# Altium PCB FPGA_Frontpanel_2_V2.PcbDoc
Units mm, origin at the board's own origin, x right, y up, seen from the top; angles counter-clockwise.
Board outline 175 x 40 mm, 2 copper layers (Top Layer, Bottom Layer), stack 1.66 mm thick; 30 components, 16 nets, 109 pads, 14 vias.
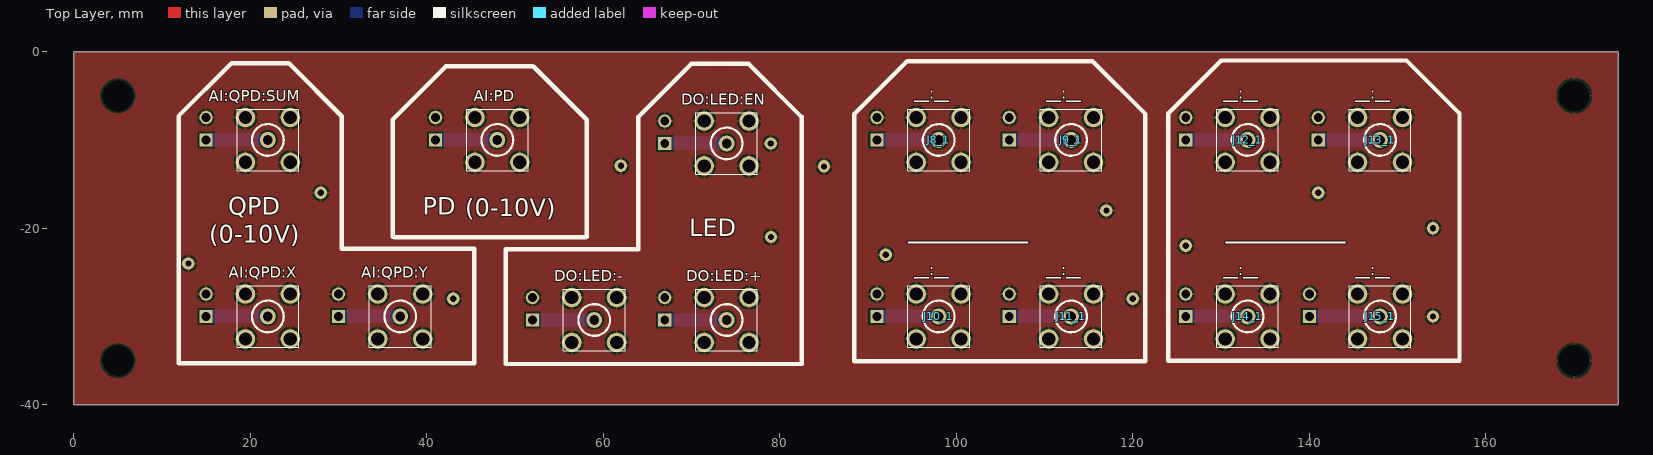
[diagram p0: Top Layer view]
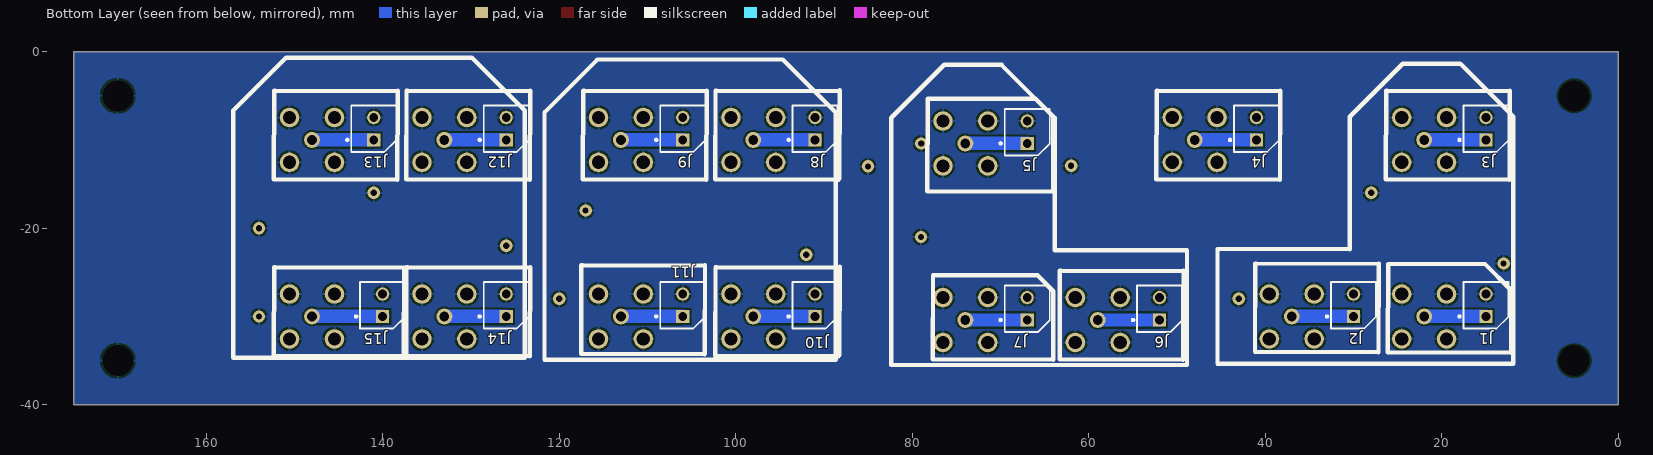
[diagram p1: Bottom Layer view, seen from below]
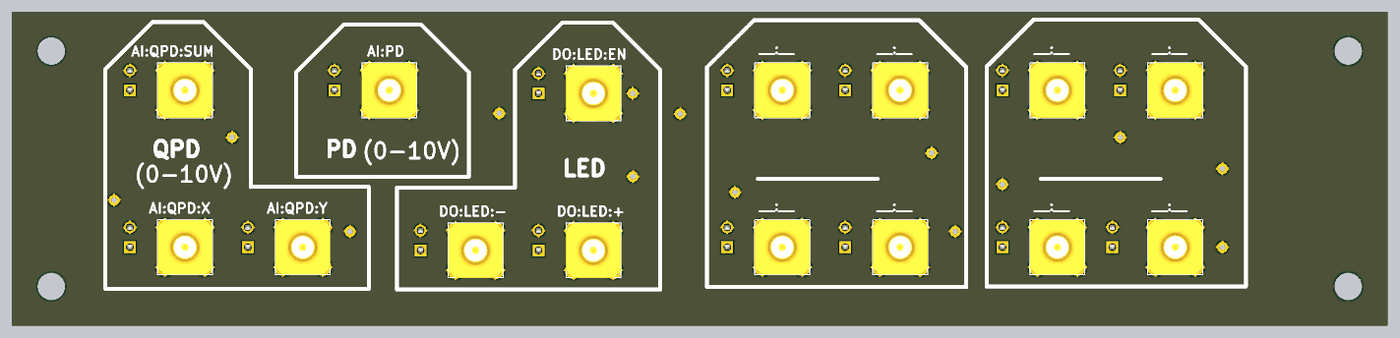
[diagram p2: 3D render of the assembled board from above, using the file's embedded part models]
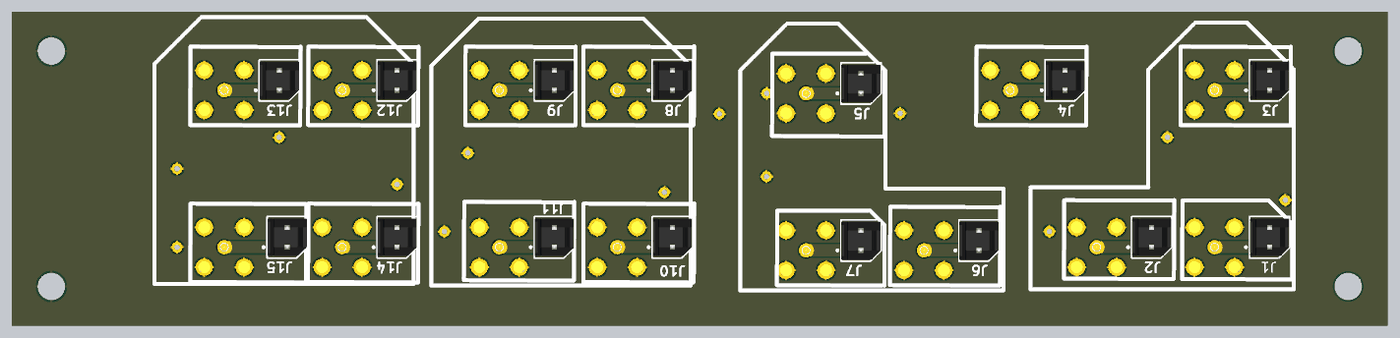
[diagram p3: 3D render of the assembled board from below, using the file's embedded part models]

## Layer stack, top to bottom
Top Solder: solder mask 0.0102, Solder Resist, Dk 3.5
Top Layer: signal copper 0.055
Dielectric1: dielectric 1.55, FR-4, Dk 4.8
Bottom Layer: signal copper 0.055
Bottom Solder: solder mask 0.0102, Solder Resist, Dk 3.5

## Board outline
0,-40 175,-40 175,0 0,0

## Design rules (kind name [scope] priority, off if disabled: settings)
Clearance clearance_polygons [InNamedPolygon('top_gnd_power')or InNamedPolygon('bottom_gnd_power') vs InNamedPolygon('top_gnd_uc')or InNamedPolygon('bottom_gnd_uc')] p1: gap=1.5 ignorepadtopadclearanceinfootprint=FALSE except(0: Arc-Hole Track-Hole SMDPad-Hole THPad-Hole Via-Hole Fill-Hole Poly-Hole Region-Hole Text-Hole)
Clearance ClearanceRoom [WithinRoom('less')  or WithinRoom('less1') or WithinRoom('less2') or WithinRoom('less3') or WithinRoom('less4')] p2: gap=0.15 ignorepadtopadclearanceinfootprint=FALSE
Clearance clearance_HP_class [InNetClass('high_power_net')] p3: gap=0.381 ignorepadtopadclearanceinfootprint=FALSE except(0: Arc-Hole Track-Hole SMDPad-Hole THPad-Hole Via-Hole Fill-Hole Poly-Hole Region-Hole Text-Hole)
Clearance "clearance_24V class" [InNetClass('24V_net')] p4: gap=0.254 ignorepadtopadclearanceinfootprint=FALSE except(0: Arc-Hole Track-Hole SMDPad-Hole THPad-Hole Via-Hole Fill-Hole Poly-Hole Region-Hole Text-Hole)
Clearance Clearance_1 [All] p5: gap=0.203 ignorepadtopadclearanceinfootprint=FALSE
FabricationTestPointUsage TestPointUsage [All] p1: valid=0 allowmultiple=FALSE
FabricationTestpoint Testpoint [All] p1: side=3 testpointundercomponent=TRUE minsize=1.016 maxsize=2.54 preferedsize=1.524 minholesize=0 maxholesize=1.016 preferedholesize=0.813 testpointgrid=0.025 allowsidetop=TRUE allowsidebottom=TRUE usegrid=TRUE gridtolerance=0
HoleSize [All] p1: absolutevalues=TRUE maxlimit=6 minlimit=0.025 maxpercent=80.000 minpercent=20.000
PolygonConnect PolygonConnect_Power [(InNet('+5V') OR InNet('-24VBUS'))] p1: connectstyle=Relief reliefconductorwidth=2.54 reliefentries=4 polygonreliefangle="90 Angle" airgapwidth=0.254
PolygonConnect [All] p2: connectstyle=Relief reliefconductorwidth=0.254 reliefentries=4 polygonreliefangle="90 Angle" airgapwidth=0.254
RoutingVias ViasRoom [WithinRoom('less')  or WithinRoom('less1') or WithinRoom('less2') or WithinRoom('less3') or WithinRoom('less4')] p1: holewidth=0.3 width=0.45 viastyle="Through Hole" minholewidth=0.3 minwidth=0.45 maxholewidth=0.3 maxwidth=0.45
RoutingVias [All] p2: holewidth=0.5 width=0.7 viastyle="Through Hole" minholewidth=0.3 minwidth=0.5 maxholewidth=0.711 maxwidth=1.27
SilkToSolderMaskClearance SilkscreenOverComponentPads [IsPad] p1: minsilkscreentomaskgap=0.254 clearancetoexposedcopper=TRUE
SolderMaskExpansion [All] p1: expansion=0.102 istentingtop=FALSE
Width WidthRoom [WithinRoom('less')  or WithinRoom('less1') or WithinRoom('less2') or WithinRoom('less3') or WithinRoom('less4')] p1: maxlimit=0.3 minlimit=0.3 preferedwidth=0.3
Width Width_HC_class [InNetClass('High_Current_net')] p2: maxlimit=15.24 minlimit=1.524 preferedwidth=1.524
Width Width_HP_class [InNetClass('High_Power_net')] p3: maxlimit=1.016 minlimit=1.016 preferedwidth=1.016
Width "Width_24V class" [InNetClass('24V_net')] p4: maxlimit=0.762 minlimit=0.762 preferedwidth=0.762
Width Width_1 [All] p5: maxlimit=1.524 minlimit=1.524 preferedwidth=1.524
26 further rules are at their usual default settings.

## Components (designator, comment, footprint, x,y, rotation, side; value= is the part's Value field where it differs from the comment)
AI:PD "J01160A0211" J01160A0211 48,-10 r0 top
AI:QPD:SUM "J01160A0211" J01160A0211 22,-10 r0 top
AI:QPD:X "J01160A0211" J01160A0211 22,-30 r0 top
AI:QPD:Y "J01160A0211" J01160A0211 37,-30 r0 top
DO:LED:+ "J01160A0211" J01160A0211 73.975,-30.4 r90 top
DO:LED:- "J01160A0211" J01160A0211 58.975,-30.4 r90 top
DO:LED:EN "J01160A0211" J01160A0211 73.975,-10.4 r90 top
J1 "66100211622" 66100211622 15,-30 r270 bottom
J2 "66100211622" 66100211622 30,-30 r270 bottom
J3 "66100211622" 66100211622 15,-10 r270 bottom
J4 "66100211622" 66100211622 41,-10 r270 bottom
J5 "66100211622" 66100211622 66.975,-10.4 r270 bottom
J6 "66100211622" 66100211622 51.975,-30.4 r270 bottom
J7 "66100211622" 66100211622 66.975,-30.4 r270 bottom
J8 "66100211622" 66100211622 91,-10 r270 bottom
J8_1 "__:__" J01160A0211 98,-10 r90 top
J9 "66100211622" 66100211622 106,-10 r270 bottom
J9_1 "__:__" J01160A0211 113,-10 r90 top
J10 "66100211622" 66100211622 91,-30 r270 bottom
J10_1 "__:__" J01160A0211 98,-30 r90 top
J11 "66100211622" 66100211622 106,-30 r270 bottom
J11_1 "__:__" J01160A0211 113,-30 r90 top
J12 "66100211622" 66100211622 126,-10 r270 bottom
J12_1 "__:__" J01160A0211 133,-10 r90 top
J13 "66100211622" 66100211622 141,-10 r270 bottom
J13_1 "__:__" J01160A0211 148,-10 r90 top
J14 "66100211622" 66100211622 126,-30 r270 bottom
J14_1 "__:__" J01160A0211 133,-30 r90 top
J15 "66100211622" 66100211622 140,-30 r270 bottom
J15_1 "__:__" J01160A0211 148,-30 r90 top

## Footprints (in the part's own frame and the unit in brackets; to place one, negate y for a bottom-side part, rotate by r counter-clockwise, add the part's x,y. Pads: shape width x height; smd on the part's side, far side on the other; paste and mask are expansions set on the pad)
66100211622 [mm] "2 Pins, stehend 2.54mm Intercom Stiftleiste WR-WTB"
  rect 1.5x1.5 hole 1: 1(0,0)
  round 1.5 hole 1: 2(-2.54,0)
  silkscreen extent -3.91,-3.13 1.37,2.55, body extent -3.66,-2.5 1.12,2.5, height 11.33
J01160A0211 [mm] "Platinenstecker  gerade, 50 Ohm, SMB"
  round 1.8 hole 1.1: 1(0,0)
  round 2.2 hole 1.5: 2(-2.54,-2.54) 2(-2.54,2.54) 2(2.54,-2.54) 2(2.54,2.54)
  silkscreen extent -3.49,-3.49 3.49,3.49, body extent -3.5,-3.5 3.5,3.5, height 7.61

## Part data
AI:PD AI:QPD:SUM AI:QPD:X AI:QPD:Y DO:LED:+ DO:LED:- DO:LED:EN J8_1 J9_1 J10_1 J11_1 J12_1 J13_1 J14_1 J15_1: library part CMP-00545-1, "RF SMB Connector, Male, Board Mount, Solder Terminal, Receptacle", Operating Frequency-Max=4kHz, Body/Shell Style=RECEPTACLE, Characteristic Impedance=50R, Connector Type=SMB, Contact Finish - Mating="COPPER NICKEL GOLD", Contact Finish - Termination=GOLD, Contact Gender=Male, Coupling Type=Snap, DIN Conformance=No, Filter Feature=No, IEC Conformance=Yes, Insulation Material=POLYTETRAFLUORO, JESD-609 Code=e4, MIL Conformance=No, Mount=Board, Mounting Style=STRAIGHT, Option="General Purpose", Panel Mount=No, REACH SVHC=Yes, RoHS Compliant=No, Termination=Solder, VSWR=1.35
J1 J2 J3 J4 J5 J6 J7 J8 J9 J10 J11 J12 J13 J14 J15: library part CMP-001-0161-A.3, "WR-WTB 2.54 mm Male Vertical Shrouded Header 2 Pins", Manufacturer="Wurth Electronics", Supplier Part Number=732-14102-ND, PartNumber=66100211622, Supplier=Digi-Key

## Free pads (board coordinates)
  round 3.302 hole 3.505 unplated: 0(5,-35) 0(5,-5) 0(170,-35) 0(170,-5)

## Via types
v1: diameter 1.4, hole 0.711, Top Layer to Bottom Layer, 14 vias

## Nets (pads, with @x,y where several pads share a name; then routed paths per layer and width w, separated by ;. In a path a pad name is that pad's centre, name@x,y a point inside that pad or via, vN(x,y) a via of type N, cw(c..) or ccw(c..) an arc to the next point about the centre after c; other vN are vias at no path point)
GND: AI:PD.2 AI:QPD:SUM.2 AI:QPD:X.2 AI:QPD:Y.2 DO:LED:+.2 DO:LED:-.2 DO:LED:EN.2 J1.2 J2.2 J3.2 J4.2 J5.2 J6.2 J7.2 J8.2 J8_1.2 J9.2 J9_1.2 J10.2 J10_1.2 J11.2 J11_1.2 J12.2 J12_1.2 J13.2 J13_1.2 J14.2 J14_1.2 J15.2 J15_1.2 pad.0@170,-5 pad.0@170,-35
  other v1: 154,-30 43,-28 120,-28 13,-24 92,-23 126,-22 79,-21 154,-20 117,-18 28,-16 141,-16 85,-13 62,-12.94 78.975,-10.4
NetAI:PD_1: AI:PD.1 J4.1 | length 7
  Bottom Layer w1.524: J4.1 AI:PD.1
NetAI:QPD:SUM_1: AI:QPD:SUM.1 J3.1 | length 7
  Bottom Layer w1.524: J3.1 AI:QPD:SUM.1
NetAI:QPD:X_1: AI:QPD:X.1 J1.1 | length 7
  Bottom Layer w1.524: J1.1 AI:QPD:X.1
NetAI:QPD:Y_1: AI:QPD:Y.1 J2.1 | length 7
  Bottom Layer w1.524: J2.1 AI:QPD:Y.1
NetDO:LED:+_1: DO:LED:+.1 J7.1 | length 7
  Bottom Layer w1.524: J7.1 DO:LED:+.1
NetDO:LED:-_1: DO:LED:-.1 J6.1 | length 7
  Bottom Layer w1.524: J6.1 DO:LED:-.1
NetDO:LED:EN_1: DO:LED:EN.1 J5.1 | length 7
  Bottom Layer w1.524: J5.1 DO:LED:EN.1
NetJ8_1: J8.1 J8_1.1 | length 7
  Bottom Layer w1.524: J8.1 J8_1.1
NetJ9_1: J9.1 J9_1.1 | length 7
  Bottom Layer w1.524: J9.1 J9_1.1
NetJ10_1: J10.1 J10_1.1 | length 7
  Bottom Layer w1.524: J10.1 J10_1.1
NetJ11_1: J11.1 J11_1.1 | length 7
  Bottom Layer w1.524: J11.1 J11_1.1
NetJ12_1: J12.1 J12_1.1 | length 7
  Bottom Layer w1.524: J12.1 J12_1.1
NetJ13_1: J13.1 J13_1.1 | length 7
  Bottom Layer w1.524: J13.1 J13_1.1
NetJ14_1: J14.1 J14_1.1 | length 7
  Bottom Layer w1.524: J14.1 J14_1.1
NetJ15_1: J15.1 J15_1.1 | length 8
  Bottom Layer w1.524: J15.1 J15_1.1

## Polygon pours and split planes (outlines as drawn)
GND on Top Layer "top gnd" (solid, remove dead copper, pour order 0): 0,-40 175,-40 175,0 0,0
GND on Bottom Layer "bot gnd" (solid, remove dead copper, pour order 1): 0,-40 175,-40 175,0 0,0

## Silkscreen, mask and mechanical layers (free items; w line width, h text height)
Top Overlay:
  lines w0.5: 24.386,-1.309 30.386,-7.309 ; 24.386,-1.299 17.89,-1.299 11.89,-7.299 11.89,-35.299 45.386,-35.299 45.386,-22.309 30.386,-22.309 ; 30.392,-22.321 30.392,-7.309 ; 36.129,-21 36.129,-7.701 42.178,-1.652 52,-1.652 ; 36.32,-21.047 58,-21.047 ; 52.129,-1.701 58.129,-7.701 58.129,-21 ; 63.968,-22.412 63.968,-7.4 ; 63.975,-22.4 48.975,-22.4 48.975,-35.391 82.471,-35.391 82.471,-7.391 76.471,-1.391 69.975,-1.391 ; 63.975,-7.4 69.975,-1.4 ; 88.42,-35.074 121.42,-35.074 121.42,-7.074 115.42,-1.074 94.42,-1.074 88.42,-7.074 88.42,-35.074 ; 124,-35 124,-7 130,-1 151,-1 157,-7 157,-35 124,-35
  text "QPD" at 17.54,-18.46 h2
  text "PD" at 39.54,-18.46 h2
  text "(0-10V)" at 44.34,-18.66 h2
  text "LED" at 69.759,-20.9 h2
  text "__________" at 94.54,-21.127 h2
  text "__________" at 130.54,-21.127 h2
  text "(0-10V)" at 15.34,-21.66 h2
Bottom Overlay:
  lines w0.5: 12.129,-34.048 12.129,-27.031 15.103,-24.057 25.96,-24.057 ; 12.146,-34.108 26.129,-34.048 26.086,-24.057 ; 12.289,-4.441 12.331,-14.432 ; 12.34,-4.501 26.163,-4.442 ; 12.348,-14.492 26.331,-14.432 26.289,-4.441 ; 24.417,-1.362 30.417,-7.362 ; 24.417,-1.353 17.921,-1.353 11.921,-7.353 11.921,-35.353 45.417,-35.353 45.417,-22.362 30.417,-22.362 ; 27.126,-23.999 27.169,-33.991 ; 27.177,-24.059 41,-24 ; 27.186,-34.05 41.169,-33.991 41.126,-23.999 ; 30.423,-22.374 30.423,-7.362 ; 38.289,-4.441 38.331,-14.432 ; 38.34,-4.501 52.163,-4.442 ; 38.348,-14.492 52.331,-14.432 52.289,-4.441 ; 49.264,-24.841 49.306,-34.832 ; 49.315,-24.9 63.138,-24.841 ; 49.323,-34.892 63.306,-34.832 63.264,-24.841 ; 63.864,-22.52 63.864,-7.507 ; 63.87,-22.507 48.87,-22.507 48.87,-35.498 82.366,-35.498 82.366,-7.498 76.366,-1.498 69.87,-1.498 ; 63.87,-7.507 69.87,-1.507 ; 88.212,-24.39 88.255,-34.382 ; 88.212,-4.39 88.255,-14.382 ; 88.34,-24.501 102.163,-24.442 ; 88.34,-4.501 102.163,-4.442 ; 88.348,-34.492 102.331,-34.432 102.289,-24.441 ; 88.348,-14.492 102.331,-14.432 102.289,-4.441 ; 103.289,-4.441 103.331,-14.432 ; 103.34,-4.501 117.163,-4.442 ; 103.348,-14.492 117.331,-14.432 117.289,-4.441 ; 103.471,-24.214 103.514,-34.205 ; 103.522,-24.273 117.345,-24.214 ; 103.531,-34.264 117.514,-34.205 117.471,-24.214 ; 123.289,-24.441 123.331,-34.432 ; 123.289,-4.441 123.331,-14.432 ; 123.34,-24.501 137.163,-24.442 ; 123.34,-4.501 137.163,-4.442 ; 123.348,-34.492 137.331,-34.432 137.289,-24.441 ; 123.348,-14.492 137.331,-14.432 137.289,-4.441 ; 138.289,-4.441 138.331,-14.432 ; 138.34,-4.501 152.163,-4.442 ; 138.348,-14.492 152.331,-14.432 152.289,-4.441 ; 152.163,-24.442 137.548,-24.504 137.591,-34.495 152.331,-34.432 152.289,-24.441 ; 64.011,-34.894 64.011,-27.14 65.806,-25.346 77.645,-25.346 77.685,-34.835 64.011,-34.894 ; 64.016,-15.893 64.016,-7.359 66.027,-5.347 78.262,-5.347 78.306,-15.832 64.016,-15.893 ; 88.659,-34.884 121.659,-34.884 121.659,-6.884 115.659,-0.884 94.659,-0.884 88.659,-6.884 88.659,-34.884 ; 123.909,-34.667 123.909,-6.667 129.909,-0.667 150.909,-0.667 156.909,-6.667 156.909,-34.667 123.909,-34.667
M1_BoardOutline:
  the board outline again, w0.5
M12_titleBlock:
  lines w0.127: -10.932,-224.52 -10.932,-31.48 ; -10.932,-176.26 -5.852,-176.26 ; -10.932,-128 -5.852,-128 ; -10.932,-79.74 -5.852,-79.74 ; -10.924,-177.352 -10.924,15.688 ; -10.924,-129.092 -5.844,-129.092 ; -10.924,-80.832 -5.844,-80.832 ; -10.924,-32.572 -5.844,-32.572 ; -5.852,-219.44 -5.852,-36.56 ; -5.844,-172.272 -5.844,10.608 ; 125.998,-188.973 162.574,-188.973 ; 126.006,-141.805 162.582,-141.805 ; 126.228,-188.96 126.228,-219.44 161.788,-219.44 ; 126.236,-141.792 126.236,-172.272 161.796,-172.272 ; 135.118,-224.52 135.118,-219.44 ; 135.126,-177.352 135.126,-172.272 ; 162.525,-211.82 276.088,-211.82 ; 162.525,-204.2 276.088,-204.2 ; 162.525,-196.58 199.888,-196.58 ; 162.533,-164.652 276.096,-164.652 ; 162.533,-157.032 276.096,-157.032 ; 162.533,-149.412 199.896,-149.412 ; 199.888,-219.44 199.888,-204.2 199.888,-188.96 ; 199.896,-172.272 199.896,-157.032 199.896,-141.792 ; 208.143,-224.52 208.143,-219.44 ; 208.151,-177.352 208.151,-172.272 ; 208.151,10.608 208.151,15.688 ; 253.228,-219.44 253.228,-204.2 ; 253.236,-172.272 253.236,-157.032 ; 276.088,-176.26 281.168,-176.26 ; 276.088,-128 281.168,-128 ; 276.088,-79.74 281.168,-79.74 ; 276.088,-36.56 276.088,-219.44 ; 276.096,-129.092 281.176,-129.092 ; 276.096,-80.832 281.176,-80.832 ; 276.096,-32.572 281.176,-32.572 ; 276.096,10.608 276.096,-172.272 ; 281.168,-224.52 281.168,-31.48 ; 281.176,-177.352 281.176,15.688 ; 199.888,-188.96 162.525,-188.96 162.525,-219.44 276.088,-219.44 ; 199.888,-188.96 276.088,-188.96 276.088,-219.44 ; 199.896,-141.792 276.096,-141.792 276.096,-172.272 ; 199.896,-141.792 162.533,-141.792 162.533,-172.272 276.096,-172.272
  lines w0.254: 228.882,-188.338 228.882,-38.478 ; 228.882,-98.116 274.602,-98.116 274.602,-95.576 274.602,-76.578 ; 228.882,-76.578 274.602,-76.578 ; 228.882,-71.498 274.602,-71.498 274.602,-76.578 ; 228.89,-141.17 228.89,8.69 ; 228.89,-50.948 274.61,-50.948 274.61,-48.408 274.61,-29.41 ; 228.89,-29.41 274.61,-29.41 ; 228.89,-24.33 274.61,-24.33 274.61,-29.41
  text "1" at 25.322,12.259 h1.24
  text "3" at 171.118,12.259 h1.24
  text "4" at 244.016,12.259 h1.24
  text "A" at -9.019,-10.754 h1.24
  text "A" at 278.001,-10.754 h1.24
  text "Abstand von Frontpanelkante" at 231.43,-16.71 h1.24
  text "links unten zum Nullpunkt:" at 231.43,-19.25 h1.24
  text "13,9mm" at 231.43,-21.79 h1.24
  text "Mechanical Layer Definitionen:" at 231.43,-28.088 h1.24
  text "M1_boardOutline" at 231.43,-31.95 h1.24
  text "M11_text_topL" at 231.43,-35.708 h1.24
  text "M12_titleBlock" at 231.43,-38.248 h1.24
  text "M13_3D_topL" at 231.43,-40.788 h1.24
  text "M14_3D_botL" at 231.43,-43.328 h1.24
  text "M15_courtyard_topL" at 231.43,-45.584 h1.24
  text "M16_courtyard_botL" at 231.43,-48.124 h1.24
  text "B" at -9.019,-58.811 h1.24
  text "B" at 278.001,-58.811 h1.24
  text "C" at -9.019,-107.325 h1.24
  text "C" at 278.001,-107.325 h1.24
  text "ENGINEER:" at 163.066,-144.332 h1.24
  text "TITLE:" at 201.166,-144.332 h1.24
  text "PCB DESIGNER:" at 163.066,-151.825 h1.24
  text "D" at -9.019,-155.331 h1.24
  text "D" at 278.001,-155.331 h1.24
  text "EMBL - European" at 121.258,-157.998 h1.24
  text "DATE:" at 163.066,-159.572 h1.24
  text "PART NO.:" at 201.166,-159.572 h1.24
  text "REV:" at 254.506,-159.572 h1.24
  text "Molecular Biology Laboratory" at 127.608,-160.538 h1.24
  text "Meyerhofstrasse 1" at 127.608,-162.443 h1.24
  text ".Print_Date" at 164.336,-162.62 h1.24
  text "69117 Heidelberg" at 127.608,-165.618 h1.24
  text "FILE NAME:" at 163.066,-167.192 h1.24
  text "DWG NO:" at 201.166,-167.192 h1.24
  text "SCALE:" at 254.506,-167.192 h1.24
  text "Germany" at 127.608,-168.475 h1.24
  text ".PCB_FILE_NAME_NO_PATH" at 164.336,-170.24 h1.24
  text "1" at 25.322,-175.701 h1.24
  text "3" at 171.118,-175.701 h1.24
  text "4" at 244.016,-175.701 h1.24